# EAGLE board ioboard (EAGLE 9.6.2)
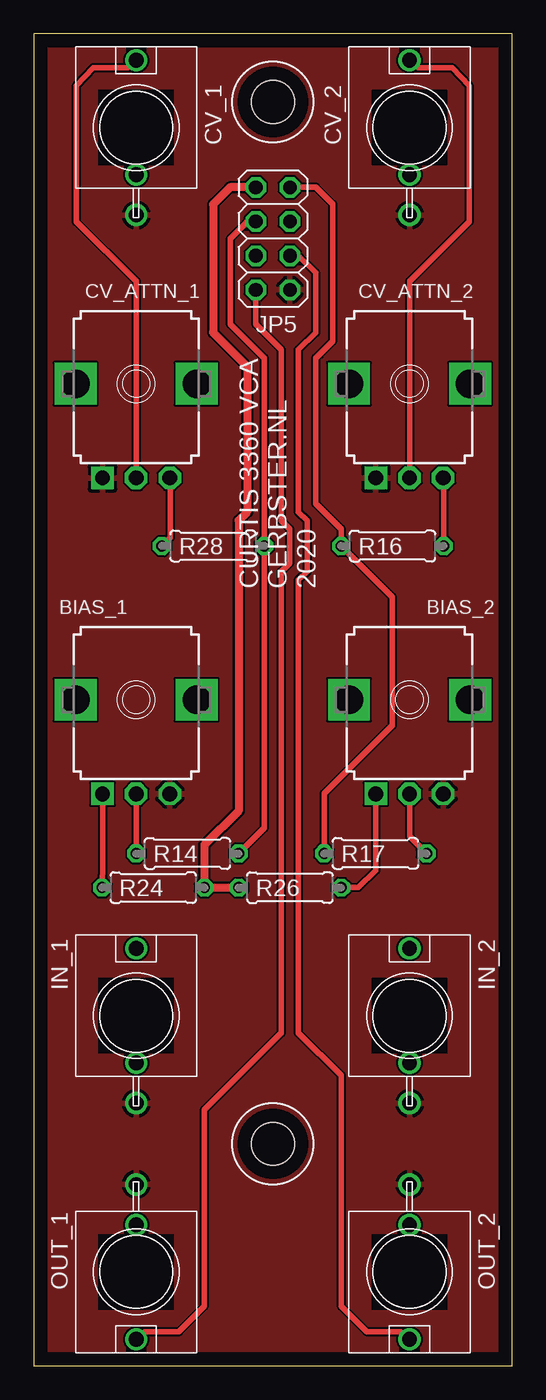
[diagram p0: board, top side]
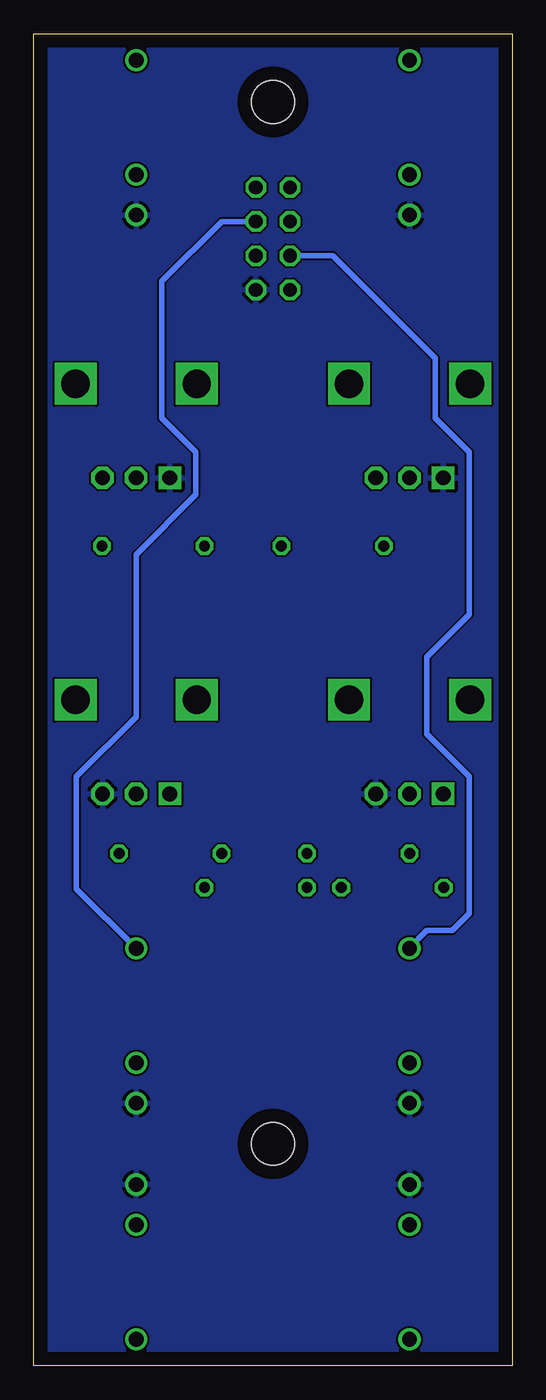
[diagram p1: board, bottom side, seen from below]

Size 35.56 x 99.06 mm. Coordinates in mm from the lower left corner, seen from the top.
Outline: 0,0 35.56,0 35.56,99.06 0,99.05 0,0
Copper layers (1*16): Top 0.035mm / dielectric 1.5mm / Bottom 0.035mm
Design rules "default": minimum track width 6mil, minimum drill 0.35mm, track to track 6mil, track to pad 6mil, pad to pad 6mil, via to via 6mil, smd to smd 6mil, copper to edge 40mil, drill to drill 6mil, minimum pad ring 10mil, minimum via ring 8mil, stop-mask expansion 4mil, vias tented up to drill 0mil, thermal gap 10mil
Holes 3.2 mm at 17.78,16.51 17.78,93.98

## Footprints (pad centres in the part's own frame; a part is rotated, then mirrored left to right if it is on the bottom)
EVUF = drill 1.1 pad 1.676 square: 1 -2.5,-7 | drill 1.1 pad 1.676 octagon: 2 0,-7; 3 2.5,-7 | drill 2.1 pad 2.8 square: M1 4.5,0; M2 -4.5,0
WQP-PJ301M-12_JACK = drill 1.1: P$1 0,5; P$2 0,-3.5; P$3 0,-6.5
2X04 = drill 1.016 octagon: 1 -3.81,-1.27; 2 -3.81,1.27; 3 -1.27,-1.27; 4 -1.27,1.27; 5 1.27,-1.27; 6 1.27,1.27; 7 3.81,-1.27; 8 3.81,1.27
0207/7 = drill 0.813 octagon: 1 -3.81,0; 2 3.81,0

## Placement (x,y rotation side)
BIAS_1  10k lin  [EVUF]  7.62,49.53 0 top
BIAS_2  10k lin  [EVUF]  27.94,49.53 0 top
CV_1  WQP-PJ301M-12_JACK  [WQP-PJ301M-12_JACK]  7.62,92.08 0 top
CV_2  WQP-PJ301M-12_JACK  [WQP-PJ301M-12_JACK]  27.94,92.08 0 top
CV_ATTN_1  100k lin  [EVUF]  7.62,73.03 0 top
CV_ATTN_2  100k lin  [EVUF]  27.94,73.03 0 top
IN_1  WQP-PJ301M-12_JACK  [WQP-PJ301M-12_JACK]  7.62,26.04 0 top
IN_2  WQP-PJ301M-12_JACK  [WQP-PJ301M-12_JACK]  27.94,26.04 0 top
JP5  [2X04]  17.78,83.82 270 top
OUT_1  WQP-PJ301M-12_JACK  [WQP-PJ301M-12_JACK]  7.62,6.99 180 top
OUT_2  WQP-PJ301M-12_JACK  [WQP-PJ301M-12_JACK]  27.94,6.99 180 top
R14  51k  [0207/7]  11.43,38.1 0 top
R16  51k  [0207/7]  26.67,60.96 0 top
R17  51k  [0207/7]  25.4,38.1 180 top
R24  12k  [0207/7]  8.89,35.56 180 top
R26  12k  [0207/7]  19.05,35.56 0 top
R28  51k  [0207/7]  13.34,60.96 180 top

## Library data of the parts
BIAS_1 BIAS_2 CV_ATTN_1 CV_ATTN_2 = TomW
CV_1 CV_2 IN_1 IN_2 OUT_1 OUT_2 = thonkiconn
JP5 = pinhead
R14 R16 R17 R24 R26 R28 = resistor

## Nets
+12V: JP5.1 R24.1 R26.1
GND: BIAS_1.3 BIAS_2.3 CV_1.P$3 CV_2.P$3 CV_ATTN_1.1 CV_ATTN_2.1 IN_1.P$3 IN_2.P$3 JP5.8 OUT_1.P$3 OUT_2.P$3
IO_CV_1: JP5.3 R14.2 R28.1
IO_CV_2: JP5.2 R16.1 R17.2
IO_IN_1: IN_1.P$1 JP5.5
IO_IN_2: IN_2.P$1 JP5.4
IO_OUT_1: JP5.7 OUT_1.P$1
IO_OUT_2: JP5.6 OUT_2.P$1
N$4: CV_ATTN_1.3 R28.2
N$13: BIAS_1.2 R14.1
N$15: BIAS_1.1 R24.2
N$17: CV_1.P$1 CV_ATTN_1.2
N$18: CV_ATTN_2.3 R16.2
N$19: CV_2.P$1 CV_ATTN_2.2
N$20: BIAS_2.2 R17.1
N$22: BIAS_2.1 R26.2

## Tracks (layer width: path | path; a pad name or v marks a point on that pad's centre or on a via)
+12V
  Top 0.61: JP5.1 14.61,87.63 13.34,86.36 13.34,76.83 15.88,74.3 15.88,63.5 15.24,62.87 15.24,41.27 12.7,38.73 R24.1 R26.1
GND
  pour Bottom: 0,99.06 0,0 35.56,0 35.56,99.06
  pour Top: 0,99.06 0,0 35.56,0 35.56,99.06
IO_CV_1
  Top 0.406: R14.2 17.14,40.01 R28.1 17.14,74.93 14.61,77.47 14.61,83.82 15.88,85.09 JP5.3
IO_CV_2
  Top 0.406: R17.2 21.59,42.55 26.67,47.62 26.67,57.15 R16.1 22.86,62.23 20.95,64.14 20.95,74.93 22.23,76.2 22.23,86.36 20.95,87.63 JP5.2
IO_IN_1
  Bottom 0.406: IN_1.P$1 6.99,31.75 6.35,32.38 4.45,32.38 3.17,33.66 3.17,43.81 6.35,46.99 6.35,52.7 3.17,55.88 3.17,67.94 5.71,70.48 5.71,74.93 13.34,82.55 JP5.5
IO_IN_2
  Bottom 0.406: IN_2.P$1 32.38,35.48 32.38,43.81 27.94,48.26 27.94,60.33 23.5,64.77 23.5,67.94 26.04,70.48 26.04,80.64 21.59,85.09 JP5.4
IO_OUT_1
  Top 0.406: OUT_1.P$1 8.26,2.54 10.79,2.54 12.7,4.45 12.7,19.05 18.41,24.77 18.41,59.05 19.05,59.69 19.05,62.23 18.41,62.87 18.41,75.56 16.51,77.47 JP5.7
IO_OUT_2
  Top 0.406: OUT_2.P$1 27.3,2.54 24.77,2.54 22.86,4.45 22.86,21.59 19.68,24.77 19.68,58.42 20.32,59.05 20.32,62.87 19.68,63.5 19.68,75.56 20.95,76.83 20.95,81.28 19.68,82.55 JP5.6
N$4
  Top 0.406: CV_ATTN_1.3 10.16,66.03 10.16,61.59 R28.2
N$13
  Top 0.406: R14.1 BIAS_1.2
  Bottom 0.406: 7.62,42.55 BIAS_1.2
N$15
  Top 0.406: BIAS_1.1 5.12,36.83 R24.2
N$17
  Top 0.406: CV_1.P$1 6.99,96.52 4.45,96.52 3.17,95.17 3.17,85.09 7.62,80.64 CV_ATTN_1.2
N$18
  Top 0.406: CV_ATTN_2.3 30.48,66.03 R16.2
N$19
  Top 0.406: CV_2.P$1 28.57,96.52 31.11,96.52 32.38,95.17 32.38,85.09 27.94,80.64 CV_ATTN_2.2
N$20
  Top 0.406: R17.1 27.94,39.37 BIAS_2.2
  Bottom 0.406: 27.94,41.91 BIAS_2.2
N$22
  Top 0.406: BIAS_2.1 25.44,36.83 24.13,35.56 R26.2

## Text on the board
tNames: CURTIS 3360 VCA / GERBSTER.NL / 2020